# Altium PCB PCB1.PcbDoc
Units mm, origin at the board's own origin, x right, y up, seen from the top; angles counter-clockwise.
Board outline 152.4 x 101.6 mm, 2 copper layers (Top Layer, Bottom Layer); 28 components, 24 nets, 125 pads, 6 vias.
Unrouted connection lines stored in the file: 4.
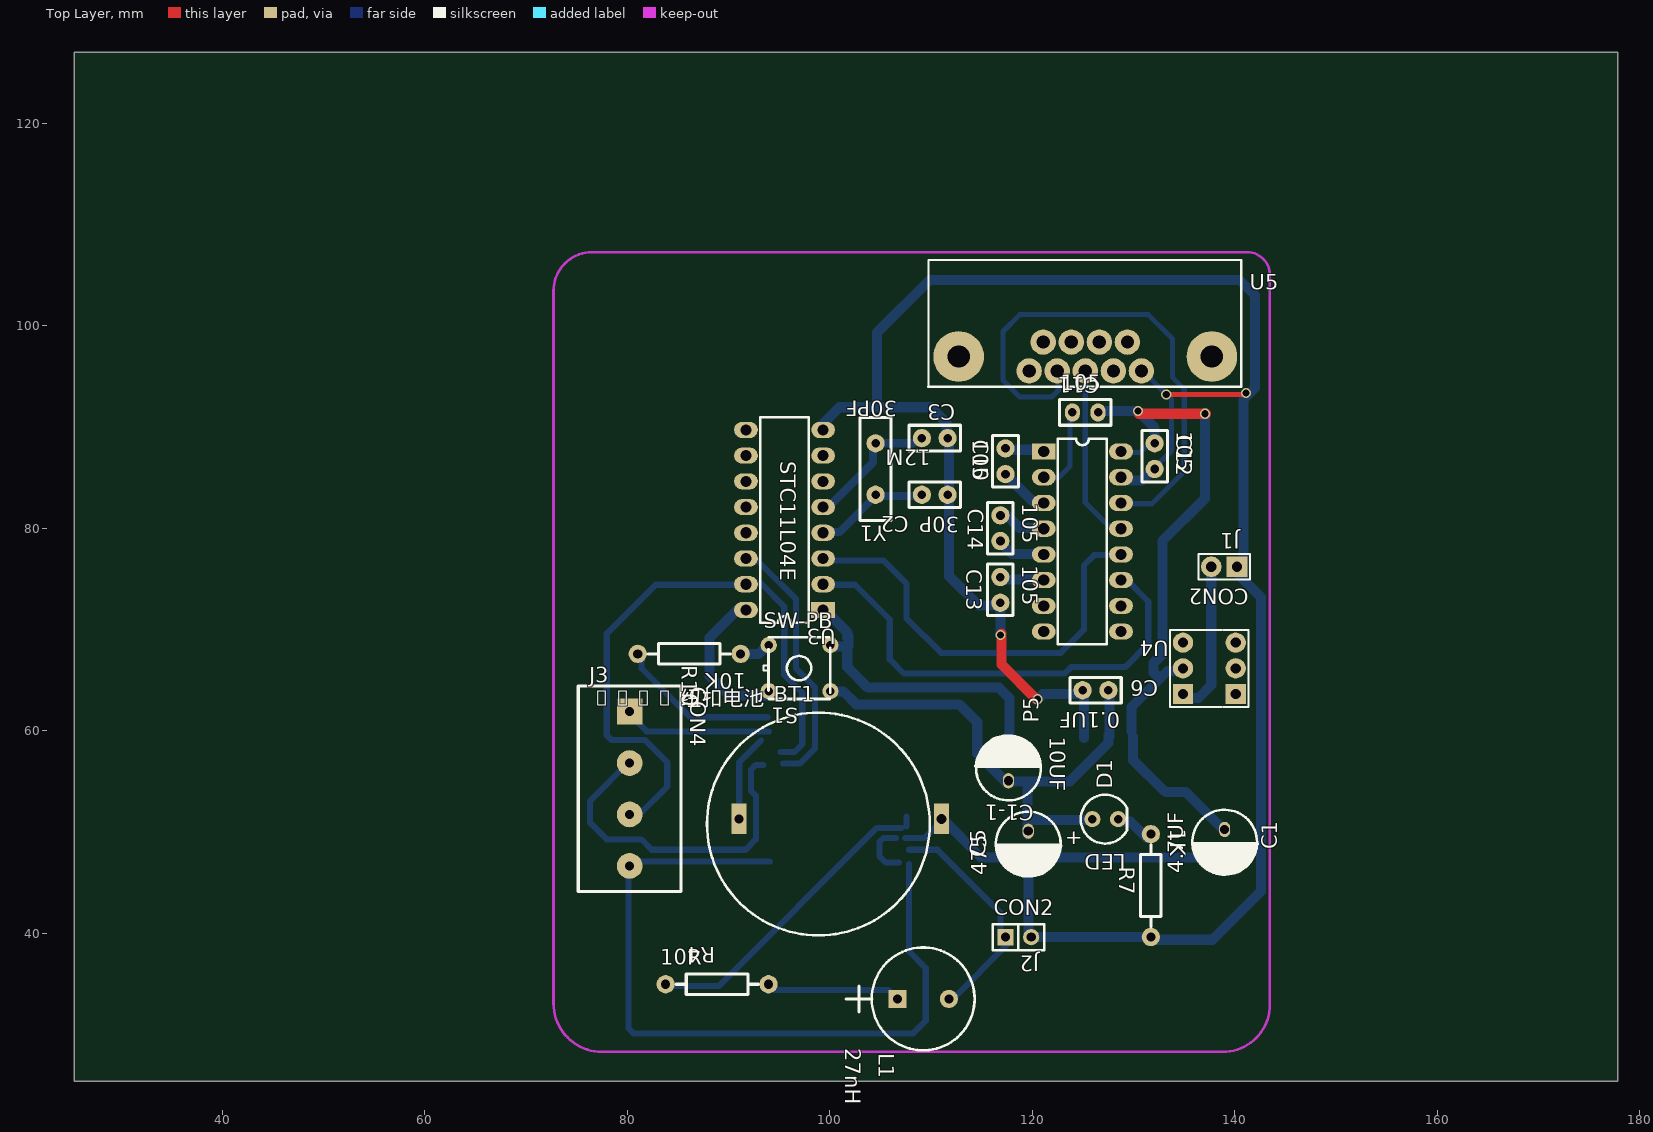
[diagram p0: Top Layer view]
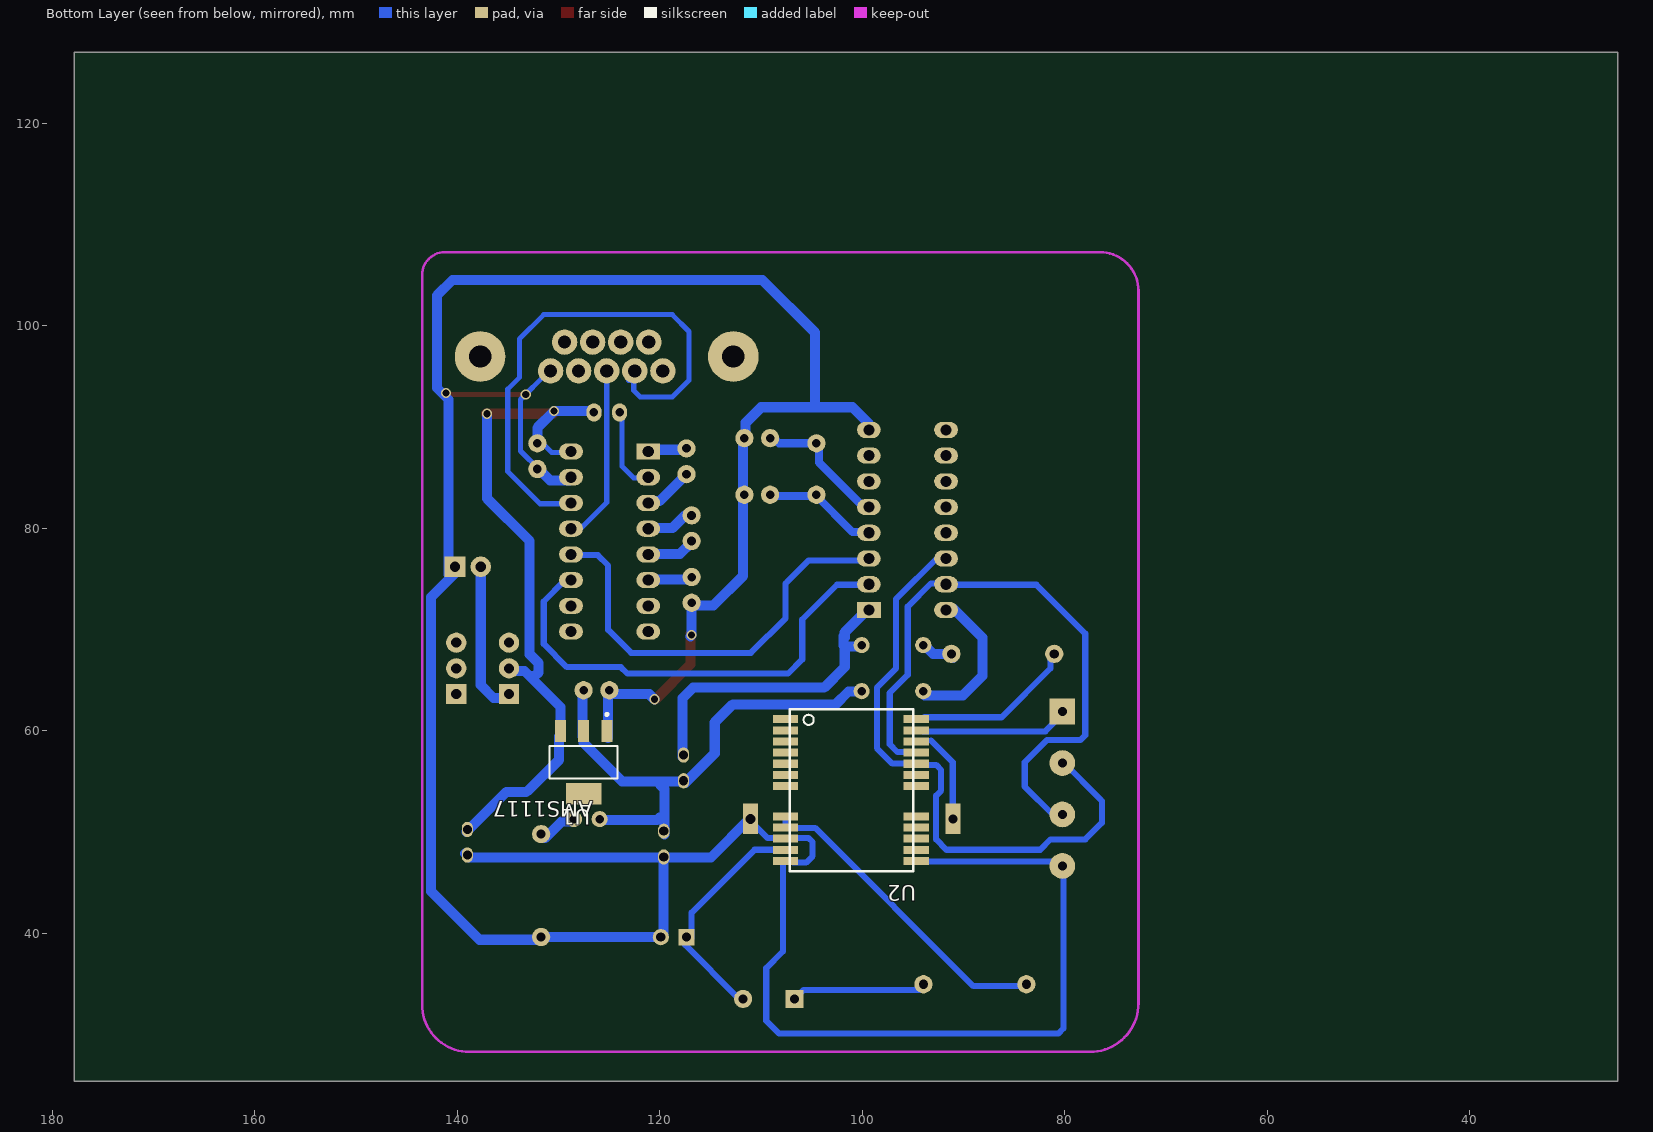
[diagram p1: Bottom Layer view, seen from below]

## Layer stack, top to bottom
Top Layer: signal copper 0.0356
Dielectric: dielectric 0.32, FR-4, Dk 4.8
Bottom Layer: signal copper 0.0356

## Board outline
25.4,25.4 177.8,25.4 177.8,127 25.4,127

## Design rules (kind name [scope] priority, off if disabled: settings)
Clearance [All] p1: gap=0.254
ComponentClearance [All] p1: gap=0.254 collisioncheckmode=3 verticalgap=0.254
PolygonConnect [All] p1: connectstyle=Relief reliefconductorwidth=0.254 reliefentries=4 polygonreliefangle="90 Angle"
RoutingVias [All] p1: holewidth=0.711 width=1.27 viastyle="Through Hole" minholewidth=0.711 minwidth=1.27 maxholewidth=0.711 maxwidth=1.27
SolderMaskExpansion [All] p1: expansion=0.102
TestPointUsage [All] p1: valid=0 allowmultiple=FALSE
Testpoint [All] p1: side=15 testpointundercomponent=TRUE minsize=1.016 maxsize=2.54 preferedsize=1.524 minholesize=0 maxholesize=1.016 preferedholesize=0.813 testpointgrid=0.025 style=1023 order=0-112345678
Width [All] p1: maxlimit=2.032 minlimit=0.254 preferedwidth=0.254 toplayer_maxwidth=1 minimp=50.000000 maximp=50.000000 favimp=50.000000
18 further rules are at their usual default settings.

## Components (designator, comment, footprint, x,y, rotation, side; value= is the part's Value field where it differs from the comment)
BT1 "3.3V 纽扣电池" CR2032 97.536,53.34 r0 top
C1 "4.7UF" 4.7UF 140.3,45.9 r90 top
C1-1 "10UF" 4.7UF 116.332,59.436 r270 top
C2 "30P" RAD-0.1#1 111.633,83.312 r180 top
C3 "30PF" RAD-0.1#1 111.633,88.9 r180 top
C5 "475" 4.7UF 120.904,45.72 r90 top
C6 "0.1UF" RAD-0.1#1 127.508,64.008 r180 top
C10 "105" RAD-0.1#1 117.348,87.884 r270 top
C11 "105" RAD-0.1#2 123.952,91.44 r0 top
C12 "105" RAD-0.1#1 132.08,88.392 r270 top
C13 "105" RAD-0.1#1 116.84,75.184 r270 top
C14 "105" RAD-0.1#3 116.84,81.28 r270 top
D1 "LED" LED 129.2,53.6 r180 top
J1 "CON2" HDR1X2 140.208,76.2 r180 top
J2 "CON2" SIP-2 117.348,39.624 r0 top
J3 "CON4" POWER-4 80.239,61.9 r270 top
L1 "27nH" RB-.2/.4 106.68,33.528 r180 top
P5 "Header 3X2" KZ 124.46,64.008 r90 top
R4 "10R" AXIAL-0.4 83.795,34.976 r0 top
R7 "1K" AXIAL-0.4 131.7,49.8 r270 top
R10 "10K" AXIAL-0.4 91.2,67.6 r180 top
S1 "SW-PB" SW-PB 93.7,63.1 r0 top
U1 "AMS1117" SOT223 127.508,56.896 r0 bottom
U2 "" NEO-6M 94.971,46.152 r0 bottom
U3 "STC11L04E" DIP-16 98.044,83.82 r180 top
U4 "" DIP-16 122.428,75.692 r0 top
U5 "" VGA 109.728,93.98 r0 top
Y1 "12M" XTAL-1 104.521,83.312 r90 top

## Footprints (in the part's own frame and the unit in brackets; to place one, negate y for a bottom-side part, rotate by r counter-clockwise, add the part's x,y. Pads: shape width x height; smd on the part's side, far side on the other; paste and mask are expansions set on the pad)
4.7UF [mm]
  oval 1.5x1.1 hole 0.9: 1(4.37,1.309) 2(1.83,1.309)
  silkscreen extent -0.1,-1.89 6.3,4.51
AXIAL-0.4 [mm]
  round 1.8 hole 0.9: 1(0,0) 2(10.16,0)
  silkscreen extent 1.02,-1.02 9.14,1.02
CR2032 [mm]
  rect 1.5x3 hole 0.9: 1(-6.509,-2.032)
  rect 1.5x3 hole 1: 2(13.491,-2.032)
  silkscreen extent -9.66,-13.54 12.34,8.46
DIP-16 [mm]
  rect 2.35x1.6 hole 1.1: 1(-1.295,11.887)
  oval 2.35x1.6 hole 1.1: 2(-1.295,9.347) 3(-1.295,6.807) 4(-1.295,4.267) 5(-1.295,1.727) 6(-1.295,-0.813) 7(-1.295,-3.353) 8(-1.295,-5.893) 9(6.325,-5.893) 10(6.325,-3.353) 11(6.325,-0.813) 12(6.325,1.727) 13(6.325,4.267) 14(6.325,6.807) 15(6.325,9.347) 16(6.325,11.887)
  silkscreen extent 0.1,-7.16 4.93,13.16
HDR1X2 [mil] "Connector; Header; 2 Position"
  rect 80x80 hole 40: 1(0,0)
  round 80 hole 40: 2(100,0)
  silkscreen extent -50,-50 150,50
KZ [mm]
  rect 2x2 hole 1: 1(-0.381,-10.414) 4(-0.381,-15.621)
  round 2 hole 1: 2(2.159,-10.414) 3(4.699,-10.414) 5(2.159,-15.621) 6(4.699,-15.621)
  silkscreen extent -1.65,-16.89 5.97,-9.14
LED [mm]
  round 1.6 hole 0.85: A(3.277,2.321) K(0.737,2.321)
  silkscreen extent -0.15,-0.09 4.42,4.73
NEO-6M [mm]
  rect 2.5x0.8 smd: 1(12.6,-15) 2(12.6,-13.9) 3(12.6,-12.8) 4(12.6,-11.7) 5(12.6,-10.6) 6(12.6,-9.5) 7(12.6,-8.4) 8(12.6,-5.4) 9(12.6,-4.3) 10(12.6,-3.2) 11(12.6,-2.1) 12(12.6,-1) 13(-0.3,-1) 14(-0.3,-2.1) 15(-0.3,-3.2) 16(-0.3,-4.3) 17(-0.3,-5.4) 18(-0.3,-8.4) 19(-0.3,-9.5) 20(-0.3,-10.6) 21(-0.3,-11.7) 22(-0.3,-12.8) 23(-0.3,-13.9) 24(-0.3,-15)
  silkscreen extent 0,-16 12.2,0
POWER-4 [mm]
  rect 2.54x2.54 hole 0.9: 1(0,0)
  round 2.54 hole 0.9: 2(5.08,0) 3(10.16,0) 4(15.24,0)
  silkscreen extent -2.54,-5.08 17.78,5.08
RAD-0.1#1 [mm]
  round 1.8 hole 0.85: 1(0,0) 2(2.54,0)
  silkscreen extent -1.27,-1.27 3.81,1.27
RAD-0.1#2 [mm]
  oval 1.5x1.8 hole 0.85: 1(0,0) 2(2.54,0)
  silkscreen extent -1.27,-1.27 3.81,1.27
RAD-0.1#3 [mm]
  round 1.8 hole 0.9: 1(0,0) 2(2.54,0)
  silkscreen extent -1.27,-1.27 3.81,1.27
RB-.2/.4 [mm]
  rect 1.8x1.8 hole 0.9: 1(0,0)
  round 1.8 hole 0.9: 2(-5.08,0)
  silkscreen extent -7.62,-5.08 5.08,5.08
SIP-2 [mm]
  rect 1.6x1.6 hole 0.9: 1(0,0)
  round 1.6 hole 0.9: 2(2.54,0)
  silkscreen extent -1.27,-1.27 3.81,1.27
SOT223 [mm] "SOT-223/SC-73; 4 Leads; Body 6.7 x 7.3 mm, inc. leads (LxW max)"
  rect 1.1x2.15 smd: 1(-2.3,-3.1) 2(0,-3.1) 3(2.3,-3.1)
  rect 3.5x2.15 smd: 4(0,3.1)
  silkscreen extent -3.35,-4.85 3.35,1.63
SW-PB [mm]
  round 1.6 hole 0.85: 1(0.269,0.814) 1(6.359,0.814) 2(0.269,5.364) 2(6.359,5.364)
  silkscreen extent -0.25,0.04 6.34,6.14
VGA [mm]
  round 5 hole 2.2: 0(3,2.98) 0(28,2.98)
  round 2.5 hole 1.3: 1(9.96,1.56) 2(12.73,1.56) 3(15.5,1.56) 4(18.27,1.56) 5(21.04,1.56) 6(11.345,4.4) 7(14.115,4.4) 8(16.885,4.4) 9(19.655,4.4)
  silkscreen extent 0,0 30.9,12.5
XTAL-1 [mm]
  round 1.8 hole 0.85: 1(0,0) 2(5.08,0)
  silkscreen extent -2.54,-1.52 7.62,1.52

## Part data
P5: "Header, 3-Pin, Dual row"

## Via types
v1: diameter 1, hole 0.7, Top Layer to Bottom Layer, 6 vias

## Nets (pads, with @x,y where several pads share a name; then routed paths per layer and width w, separated by ;. In a path a pad name is that pad's centre, name@x,y a point inside that pad or via, vN(x,y) a via of type N, cw(c..) or ccw(c..) an arc to the next point about the centre after c; other vN are vias at no path point)
3.3V: C1-1.1 C5.1 C6.1 D1.A J3.1 S1.1 U1.2 U2.23 U3.16 | length 79.5
  Bottom Layer w0.6: J3.1@80.391,61.468 81.915,59.944 U2.23@93.98,59.944
  Bottom Layer w1: U3.16@90.932,72.009 88.138,69.215 88.138,65.405 90.043,63.5 S1.1@93.853,63.5 ; S1.1@100.203,63.881 101.346,63.881 102.616,62.611 112.776,62.611 114.554,60.833 114.554,57.785 C1-1.1@117.475,54.864 ; C1-1.1@117.602,54.991 123.698,54.991 127.508,58.801 U1.2@127.508,59.563 ; C5.1@119.507,49.784 119.507,54.229 119.888,54.61 ; 120.015,51.435 120.269,51.181 D1.A@126.111,51.181 ; U1.2@127.635,59.436 C6.1@127.635,64.262
GND: BT1.2 C1.2 C2.1 C3.1 C5.2 C6.2 C12.2 C13.2 J1.1 J2.2 J3.4 R7.2 R10.2 U1.1 U2.10 U2.12 U2.13 U2.24 U3.8 U4.15 U5.5 | length 348.4
  Top Layer w0.5: v1(133.223,93.218) v1@140.97,93.218
  Top Layer w1: v1@116.967,69.596 116.967,66.548 v1@120.396,63.119
  Bottom Layer w0.5: C6.2@124.714,64.389 C6.2@125.222,63.881 ; U5.5@131.191,95.25 133.731,92.71 133.731,87.63 C12.2@131.826,85.725
  Bottom Layer w0.6: J3.4@80.137,45.847 80.137,30.607 80.645,30.099 108.204,30.099 109.474,31.369 109.474,36.576 107.823,38.227 U2.12@107.823,46.863 ; J3.4@80.137,46.99 80.264,47.117 U2.13@94.107,47.117 ; R10.2@81.407,67.437 81.407,66.167 86.233,61.341 U2.24@93.853,61.341 ; U2.10@106.553,49.403 105.283,49.403 104.902,49.022 104.902,47.625 105.537,46.99 U2.12@106.807,46.99 ; U2.10@107.442,49.403 109.347,49.403 BT1.2@110.617,50.673
  Bottom Layer w1: U3.8@99.314,90.297 100.965,91.948 109.982,91.948 111.506,90.424 C3.1@111.506,89.154 ; 104.648,91.948 104.648,99.314 109.855,104.521 140.462,104.521 141.986,102.997 141.986,93.853 140.843,92.71 J1.1@140.843,75.438 ; BT1.2@111.125,51.308 114.935,47.498 138.811,47.498 C1.2@139.192,47.879 ; C3.1@111.76,88.773 111.76,75.311 114.681,72.39 C13.2@117.094,72.39 ; C13.2@116.84,72.39 v1(116.84,69.469) v1@116.967,69.342 ; C5.2@119.634,47.244 119.634,39.751 J2.2@119.888,39.497 ; J2.2@120.015,39.497 120.142,39.624 R7.2@131.572,39.624 ; v1(120.523,63.119) 121.031,63.627 C6.2@124.587,63.627 ; C6.2@124.968,63.754 125.095,63.627 U1.1@125.095,59.309 ; U4.15@128.905,84.709 130.81,84.709 C12.2@131.953,85.852 ; R7.2@131.699,39.37 137.795,39.37 142.578,44.153 142.578,73.195 J1.1@140.081,75.692
  other v1: 141.097,93.345
NetBT1_1: BT1.1 U2.22 | length 8.6
  Bottom Layer w0.6: BT1.1@91.059,51.181 91.059,56.769 ; 91.059,56.896 93.218,59.055
NetC1-1_2: C1-1.2 R10.1 S1.2 U3.1 | length 34.5
  Bottom Layer w1: R10.1@91.059,67.183 R10.1@91.059,67.437 ; R10.1 93,67.6 S1.2@93.98,68.58 ; U3.1@99.695,71.755 101.727,69.723 101.727,69.215 ; S1.2@99.949,68.326 101.727,68.326 101.727,66.421 ; 101.727,66.294 103.759,64.262 116.713,64.262 117.729,63.246 C1-1.2@117.729,57.404 ; 101.854,68.453 101.854,69.342
NetC2_2: C2.2 U3.4 Y1.1 | length 10.3
  Bottom Layer w0.762: U3.4@99.822,79.629 100.965,79.629 Y1.1@104.648,83.312 ; Y1.1@104.902,83.185 C2.2@108.839,83.185
NetC3_2: C3.2 U3.5 Y1.2 | length 13.1
  Bottom Layer w0.8: U3.5@99.314,81.788 99.568,81.788 104.267,86.487 Y1.2@104.267,88.392 ; Y1.2@104.648,88.392 108.204,88.392 C3.2@108.712,88.9
NetC10_1: C10.1 U4.1 | length 2.9
  Bottom Layer w1: C10.1@117.602,87.757 U4.1@120.523,87.757
NetC10_2: C10.2 U4.3 | length 5.2
  Bottom Layer w1: C10.2@117.475,85.217 120.015,82.677 U4.3@121.666,82.677
NetC11_1: C11.1 U4.2 | length 7.3
  Bottom Layer w0.5: U4.2@121.793,84.963 122.555,84.963 123.698,86.106 C11.1@123.698,91.059
NetC13_1: C13.1 U4.6 | length 4.6
  Bottom Layer w1: C13.1@116.586,74.93 U4.6@121.158,74.93
NetC14_1: C14.1 U4.4 | length 4.1
  Bottom Layer w1: C14.1@117.475,81.28 118.745,80.01 U4.4@121.031,80.01
NetC14_2: C14.2 U4.5 | length 4.7
  Bottom Layer w1: C14.2@116.84,78.613 117.983,77.47 U4.5@121.031,77.47
NetD1_K: D1.K R7.1 | length 3.6
  Bottom Layer w1: D1.K@128.397,51.054 129.667,51.054 R7.1@131.318,49.403
NetL1_1: L1.1 R4.2 | length 13.4
  Bottom Layer w0.6: R4.2@93.98,34.417 105.791,34.417 L1.1@106.934,33.274
NetR4_1: R4.1 U2.8 U2.9 | length 30.7
  Bottom Layer w0.6: R4.1@83.82,34.798 89.027,34.798 104.648,50.419 U2.9@107.061,50.419 ; U2.9@107.569,50.546 107.571,50.548 U2.8
NetU4_13: U4.13 U5.3 | length 16.5
  Bottom Layer w0.5: U5.3@125.222,94.742 125.222,82.55 U4.13@128.27,79.502
NetU4_14: U4.14 U5.2 | length 52.2
  Bottom Layer w0.5: U5.2@122.555,95.25 122.555,93.599 121.92,92.964 118.745,92.964 117.094,94.615 117.094,99.441 118.745,101.092 131.445,101.092 133.858,98.679 133.858,94.869 135.001,93.726 135.001,85.598 131.826,82.423 U4.14@129.286,82.423 ; U5.2@122.809,94.615 U5.2@123.063,94.615
"RF IN": J2.1 L1.2 U2.11 | length 22.1
  Bottom Layer w0.6: U2.11@107.823,48.26 110.617,48.26 116.84,42.037 J2.1@116.84,39.497 ; L1.2@111.887,33.655 112.268,33.655 117.475,38.862 J2.1@117.475,39.116
RXD: U3.3 U4.12 | length 42
  Bottom Layer w0.6: U3.3@99.568,76.835 103.124,76.835 ; 103.251,76.835 105.283,76.835 107.442,74.676 ; 107.569,74.549 107.569,71.12 110.998,67.691 122.809,67.691 125.095,69.977 125.095,76.327 126.111,77.343 U4.12@128.397,77.343
RXD1: J3.3 U2.21 U3.15 | length 61.1
  Bottom Layer w0.6: J3.3@80.137,51.689 81.153,51.689 83.947,54.483 83.947,56.896 81.733,59.11 78.431,59.11 77.978,59.563 77.978,69.596 82.804,74.422 U3.15@91.44,74.422 ; U3.15@92.075,74.549 93.218,74.549 95.504,72.263 95.504,65.532 97.282,63.754 97.282,58.674 96.52,57.912 U2.21@95.123,57.912
TXD: U3.2 U4.11 | length 45.8
  Bottom Layer w0.6: U3.2@99.695,74.422 102.362,74.422 ; 102.489,74.422 105.918,70.993 105.918,67.056 107.315,65.659 123.19,65.659 123.825,66.294 129.159,66.294 131.445,68.58 131.445,72.771 U4.11@129.413,74.803
TXD1: J3.2 U2.20 U3.14 | length 59.3
  Bottom Layer w0.6: 76.327,53.086 76.327,50.927 77.978,49.276 81.407,49.276 82.423,48.26 91.694,48.26 92.71,49.276 92.71,53.594 92.202,54.102 92.202,56.134 92.71,56.642 U2.20@93.472,56.642 ; 76.454,53.213 J3.2@80.264,57.023 ; U3.14@92.456,77.216 96.647,73.025 96.647,66.167 98.552,64.262 98.552,58.293 97.028,56.769 U2.20@95.377,56.769
VCC: J1.2 P5.1 | length 14.6
  Bottom Layer w1: P5.1@134.874,63.246 136.398,63.246 137.668,64.516 J1.2@137.668,75.819
VCC_5V: C1.1 C11.2 C12.1 P5.2 U1.3 U4.16 | length 69.6
  Top Layer w1: v1@130.556,91.313 v1@137.16,91.313
  Bottom Layer w0.5: U4.16@128.651,87.503 130.683,87.503 C12.1@131.953,88.773
  Bottom Layer w1: C11.2@126.238,91.567 v1(130.429,91.567) 132.08,89.916 C12.1@132.08,88.138 ; U1.3@129.794,59.944 129.794,62.357 133.35,65.913 P5.2@134.366,65.913 ; U1.3@129.921,59.436 129.921,57.15 132.969,54.102 ; 132.588,65.405 132.334,65.405 131.953,65.786 131.953,66.675 132.842,67.564 132.842,78.74 137.033,82.931 v1@137.033,91.186 ; 133.223,53.975 135.128,53.975 C1.1@139.065,50.038
  other v1: 137.033,91.313
pads on no net: P5.3 P5.4 P5.5 P5.6 U1.4 U2.1 U2.2 U2.3 U2.4 U2.5 U2.6 U2.7 U2.14 U2.15 U2.16 U2.17 U2.18 U2.19 U3.6 U3.7 U3.9 U3.10 U3.11 U3.12 U3.13 U4.7 U4.8 U4.9 U4.10 U5.0 U5.1 U5.4 U5.6 U5.7 U5.8 U5.9

## Keep-outs
Keep-Out Layer:
  lines w0.254: 136.169,107.264 141.199,107.264 cw(c141.199,105.004) 143.459,105.004 143.459,32.969 cw(c138.786,32.969) 138.786,28.296 77.521,28.296 cw(c77.521,33.096) 72.72,33.096 72.72,103.454 cw(c76.53,103.454) 76.53,107.264 136.525,107.264

## Text inside footprints (layer, text, board x,y; h text height)
D1: Top Overlay "+" at 124.958,50.035 h1.5 r180